# Altium PCB main.PcbDoc (part 1 of 3)
Units mm, origin at the board's own origin, x right, y up, seen from the top; angles counter-clockwise.
Board outline 74.1 x 99.1 mm, 4 copper layers (Top Layer, Ground Layer, Power Layer, Bottom Layer), stack 1.591 mm thick; 213 components, 167 nets, 923 pads, 289 vias.
Unrouted connection lines stored in the file: 41.
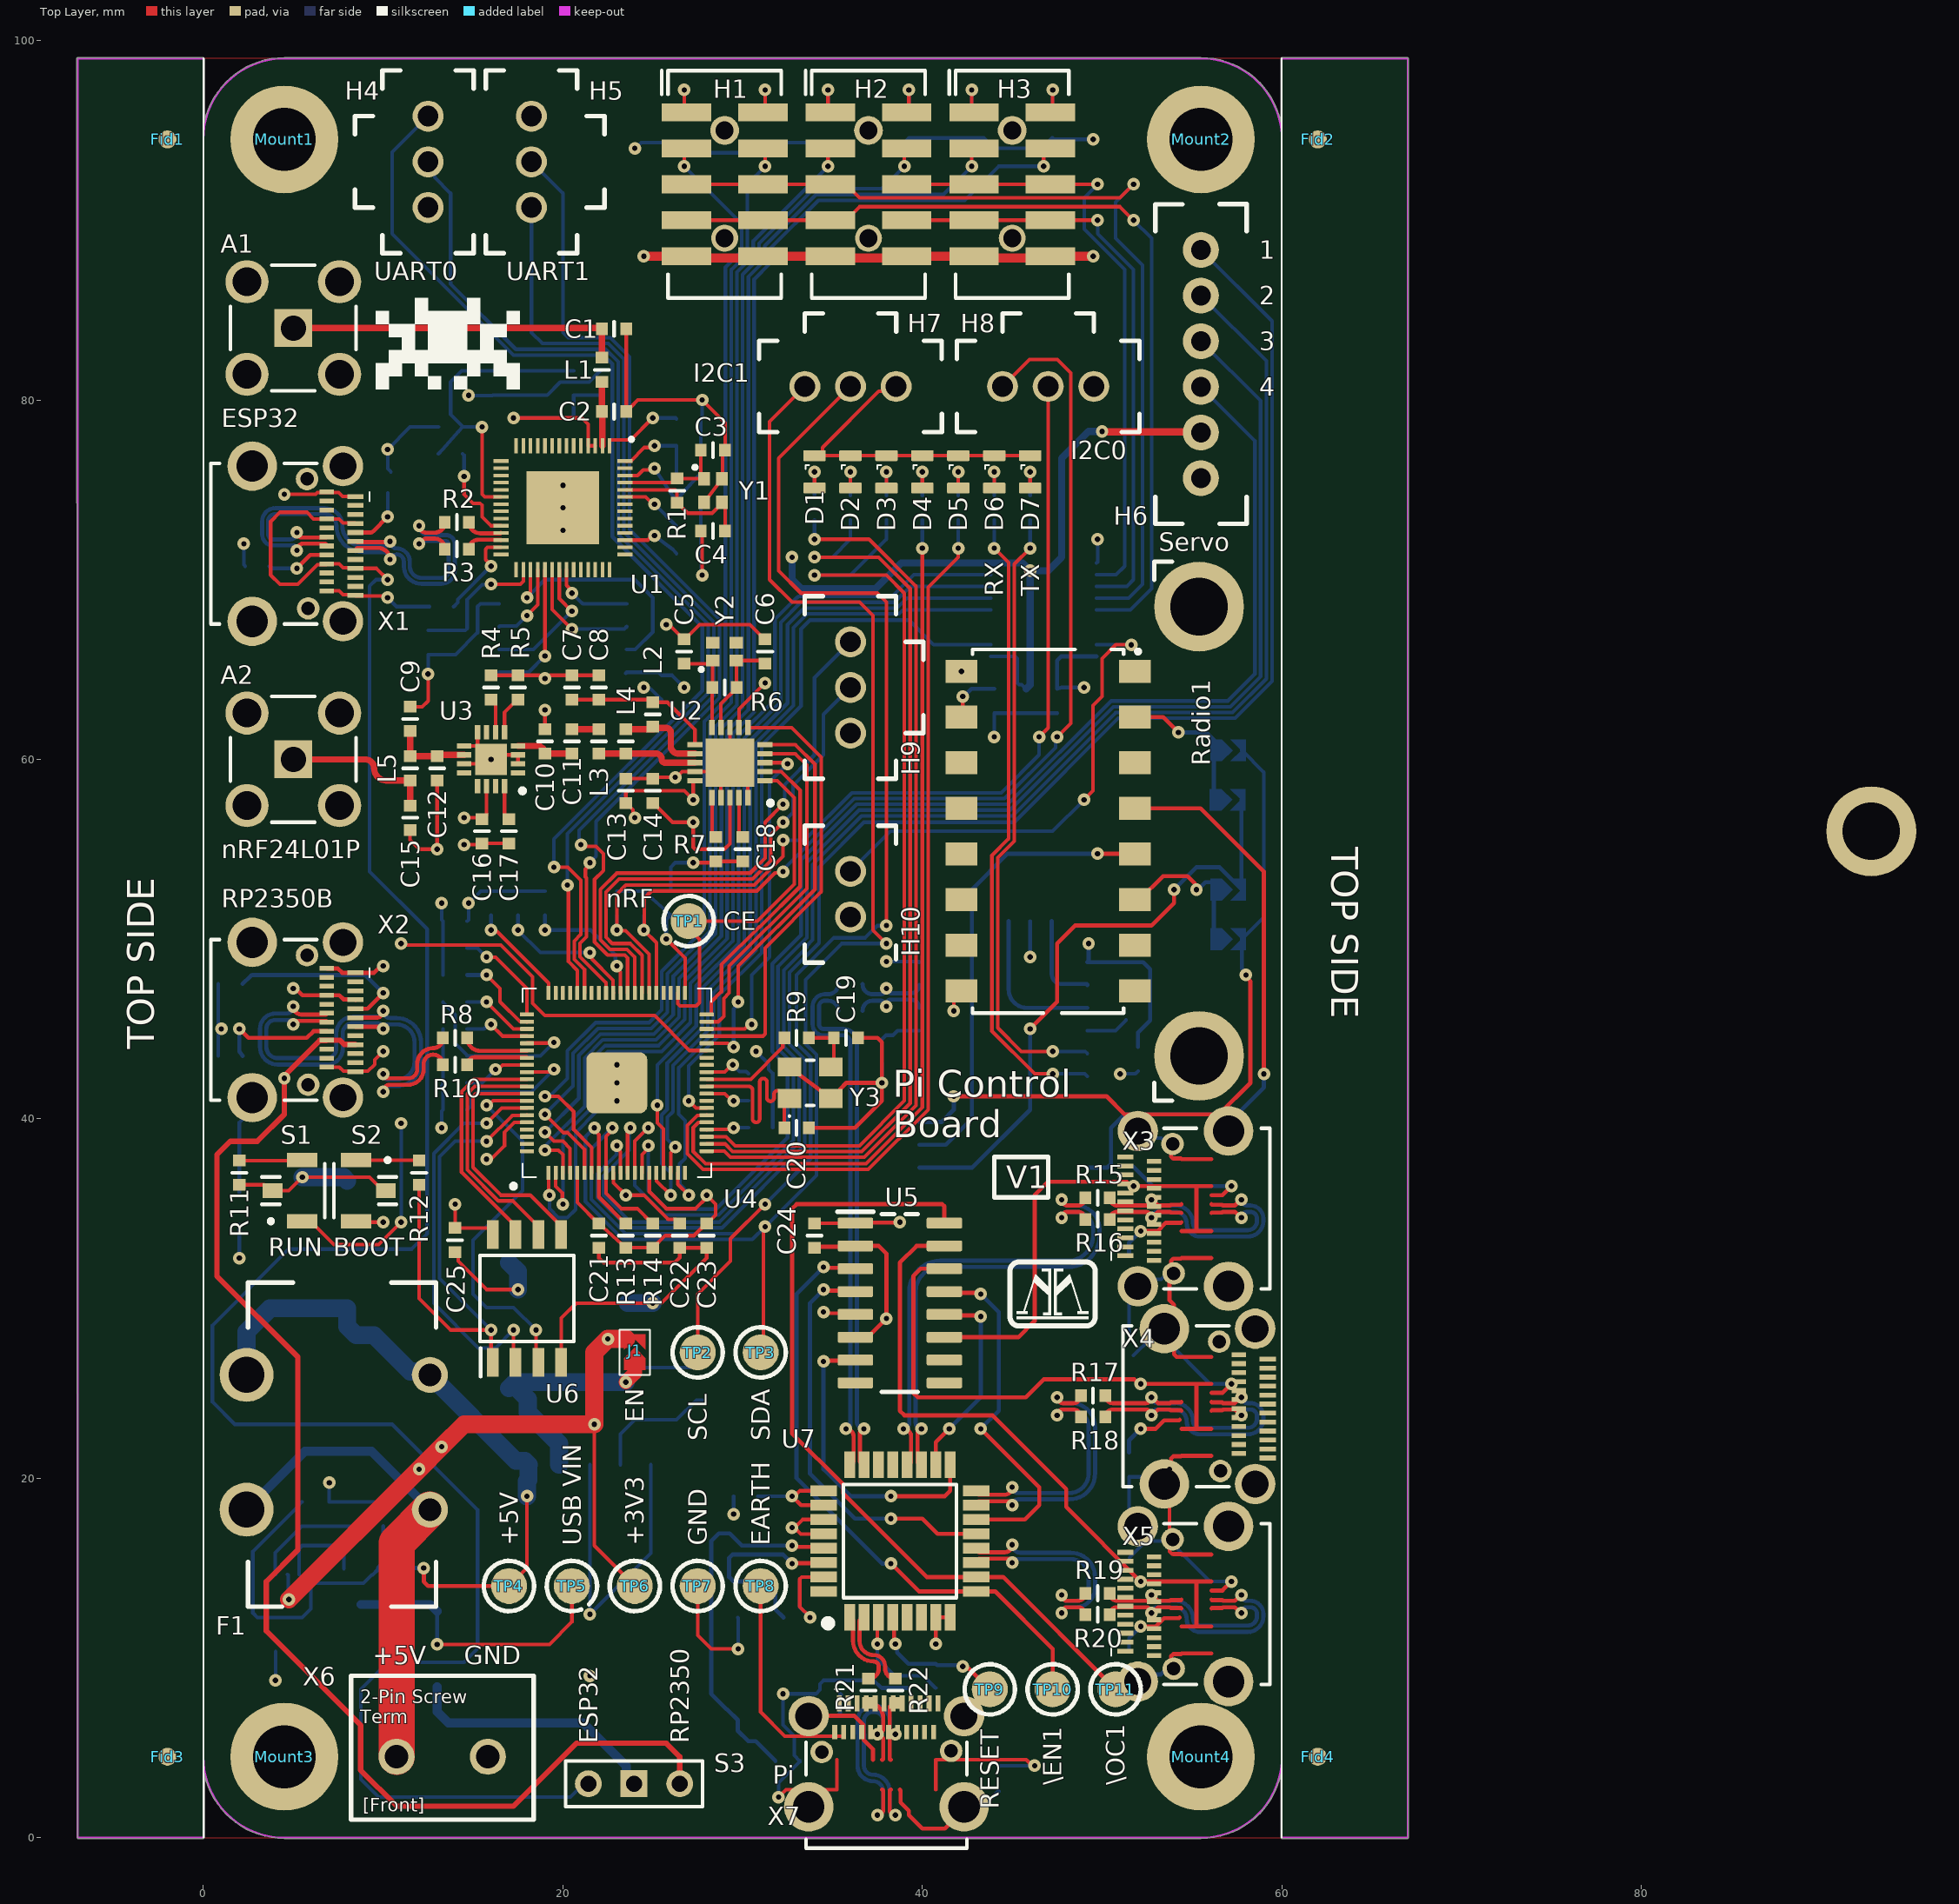
[diagram p0: Top Layer view]
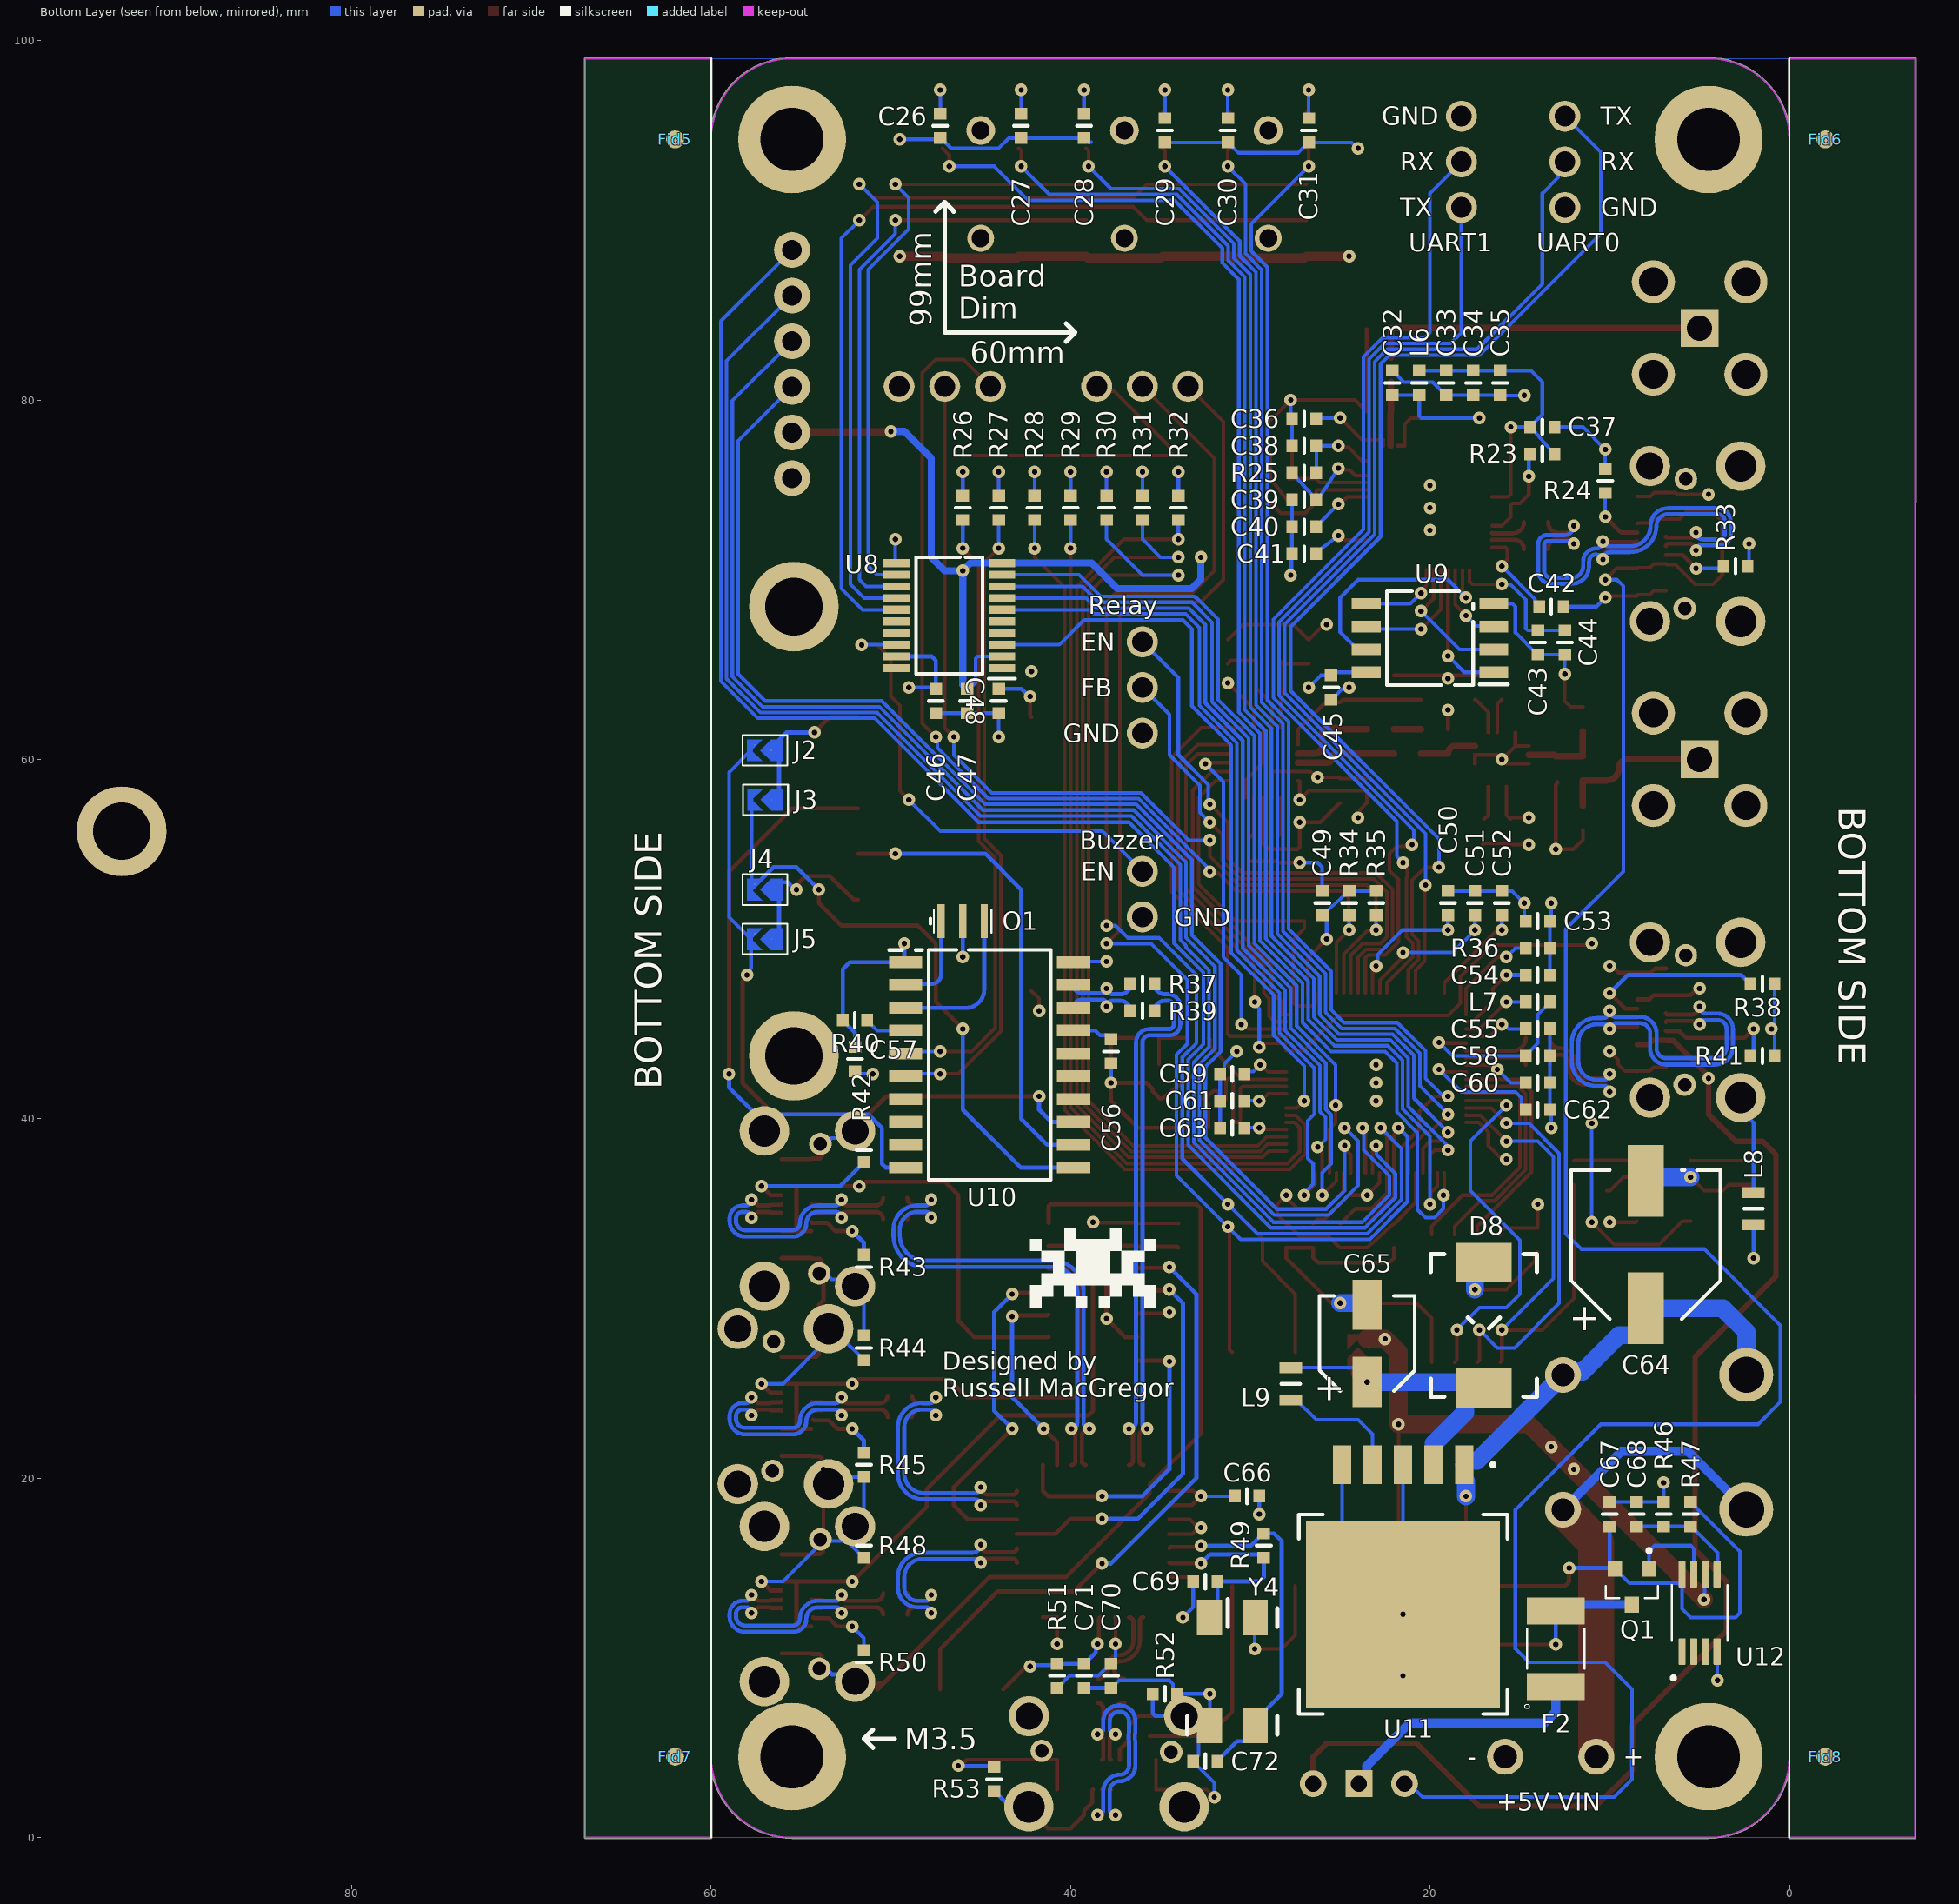
[diagram p1: Bottom Layer view, seen from below]
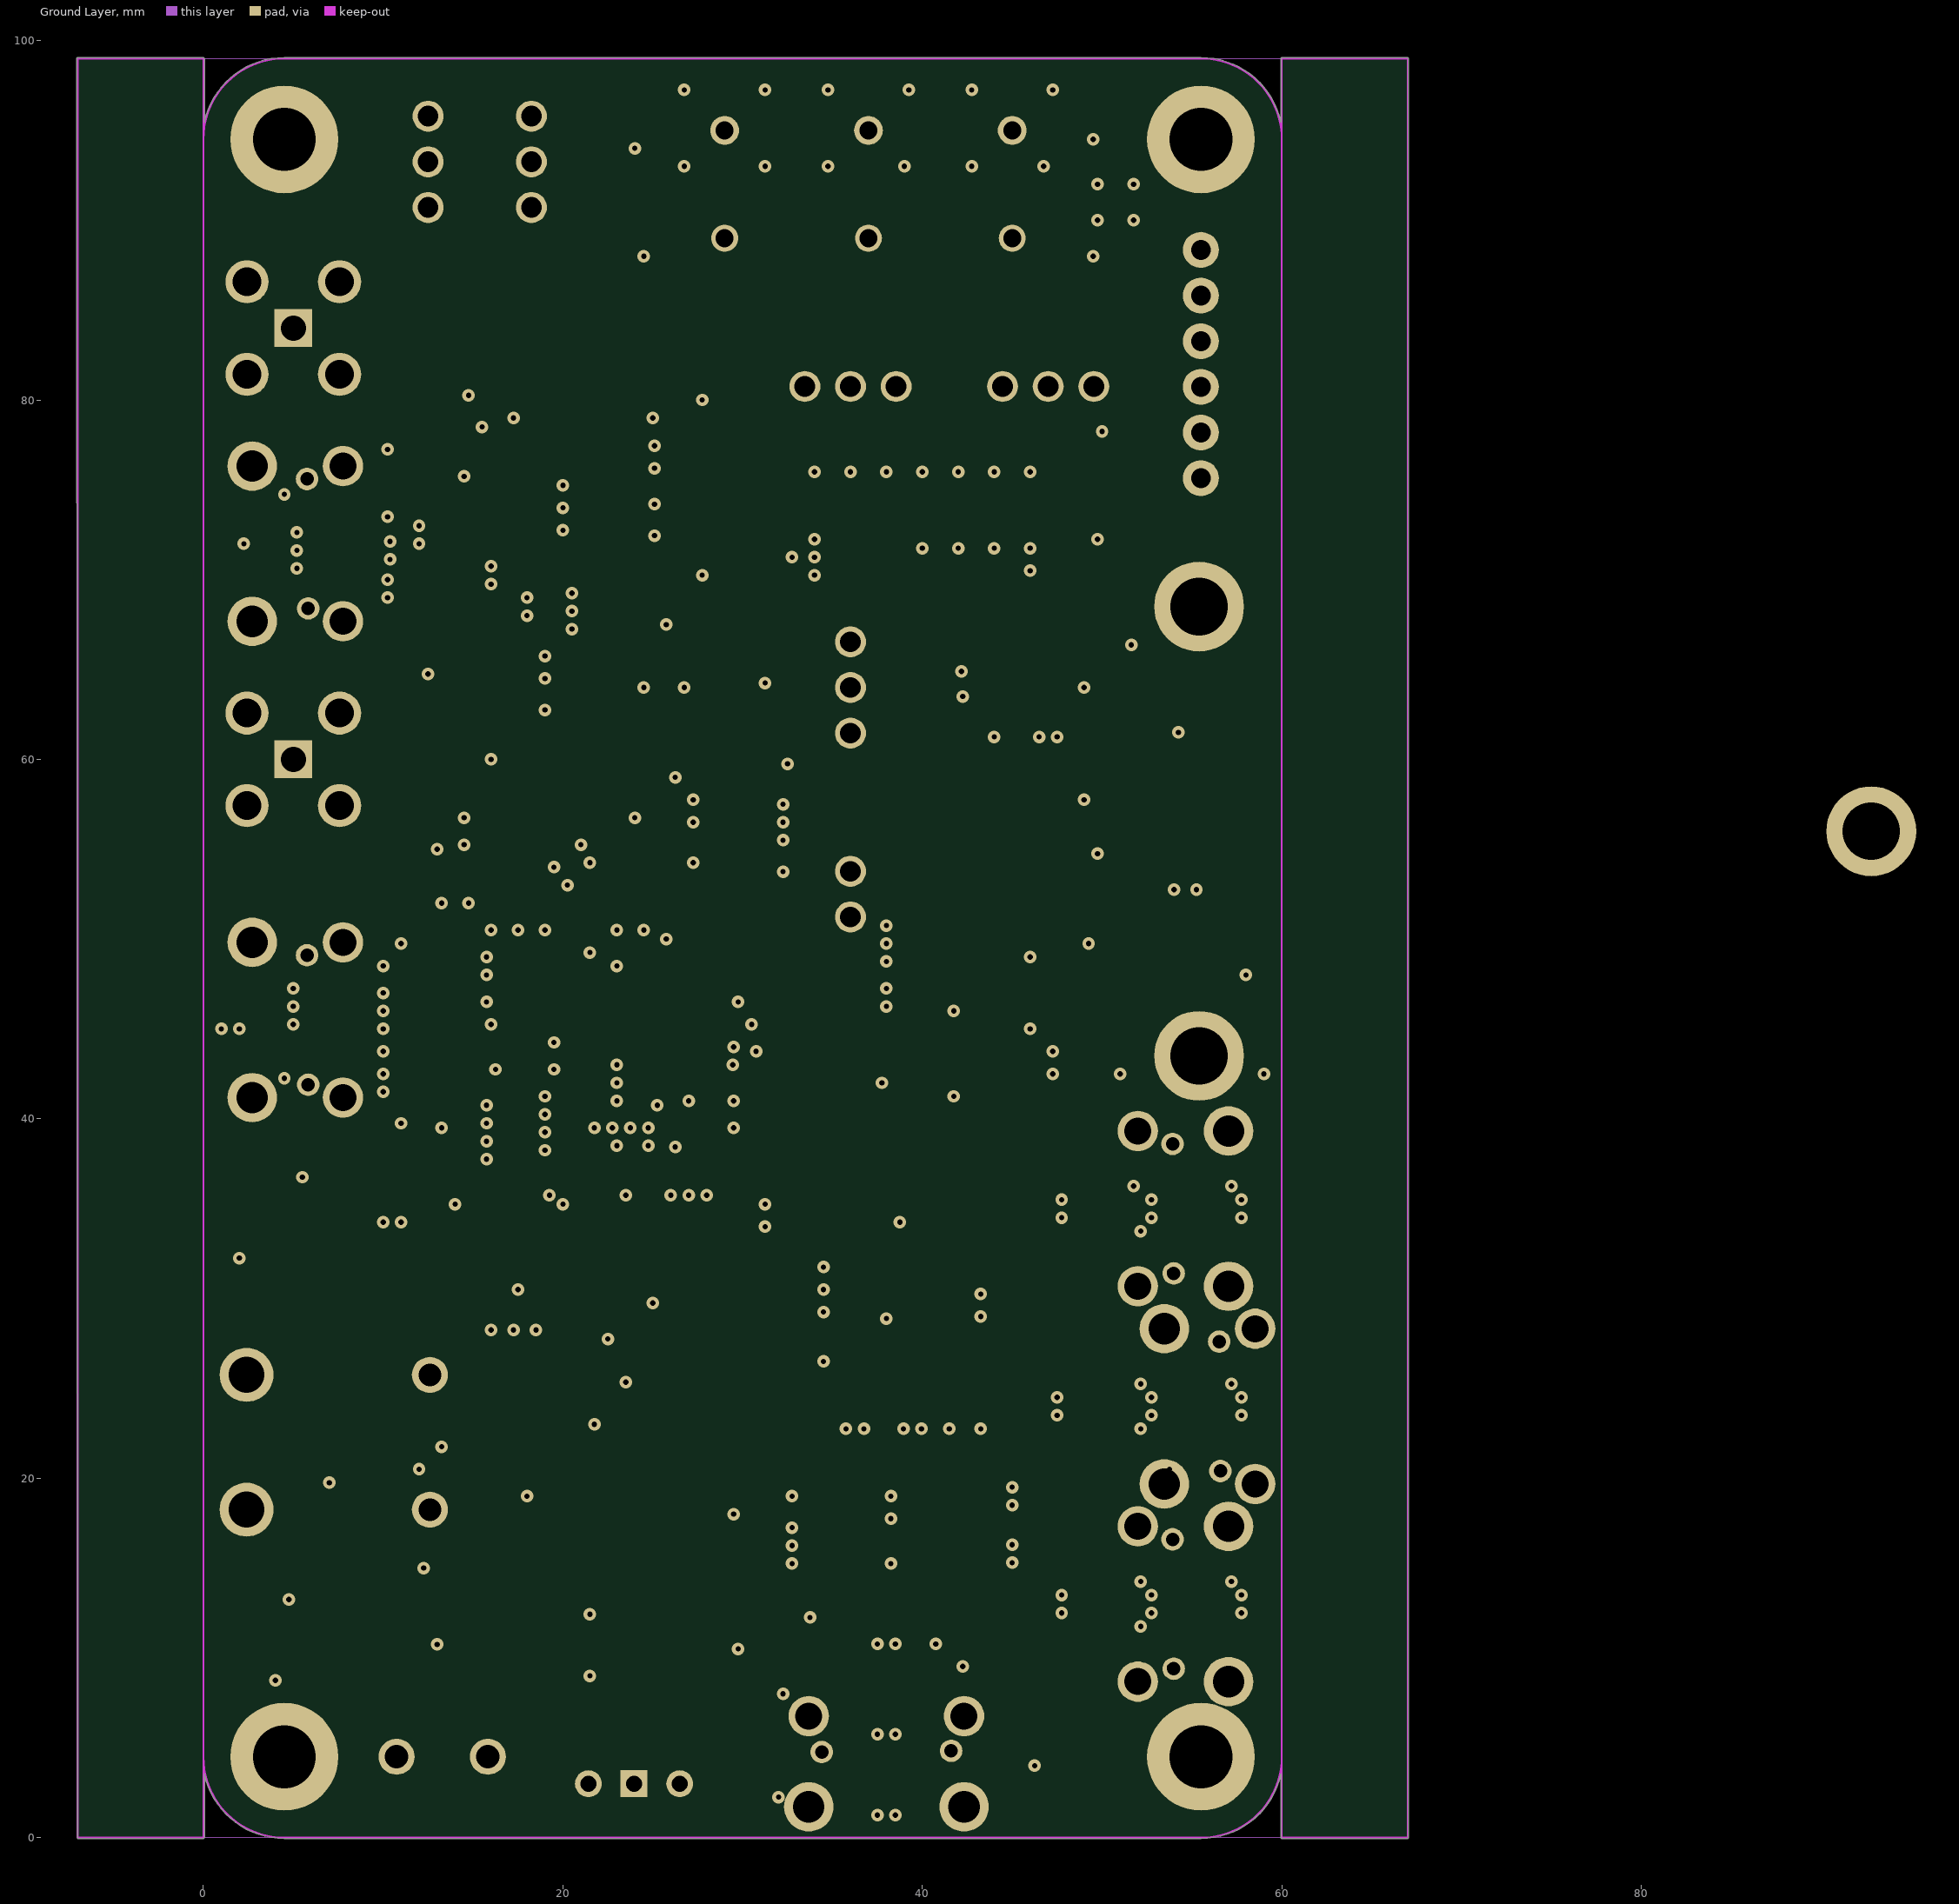
[diagram p2: Ground Layer]
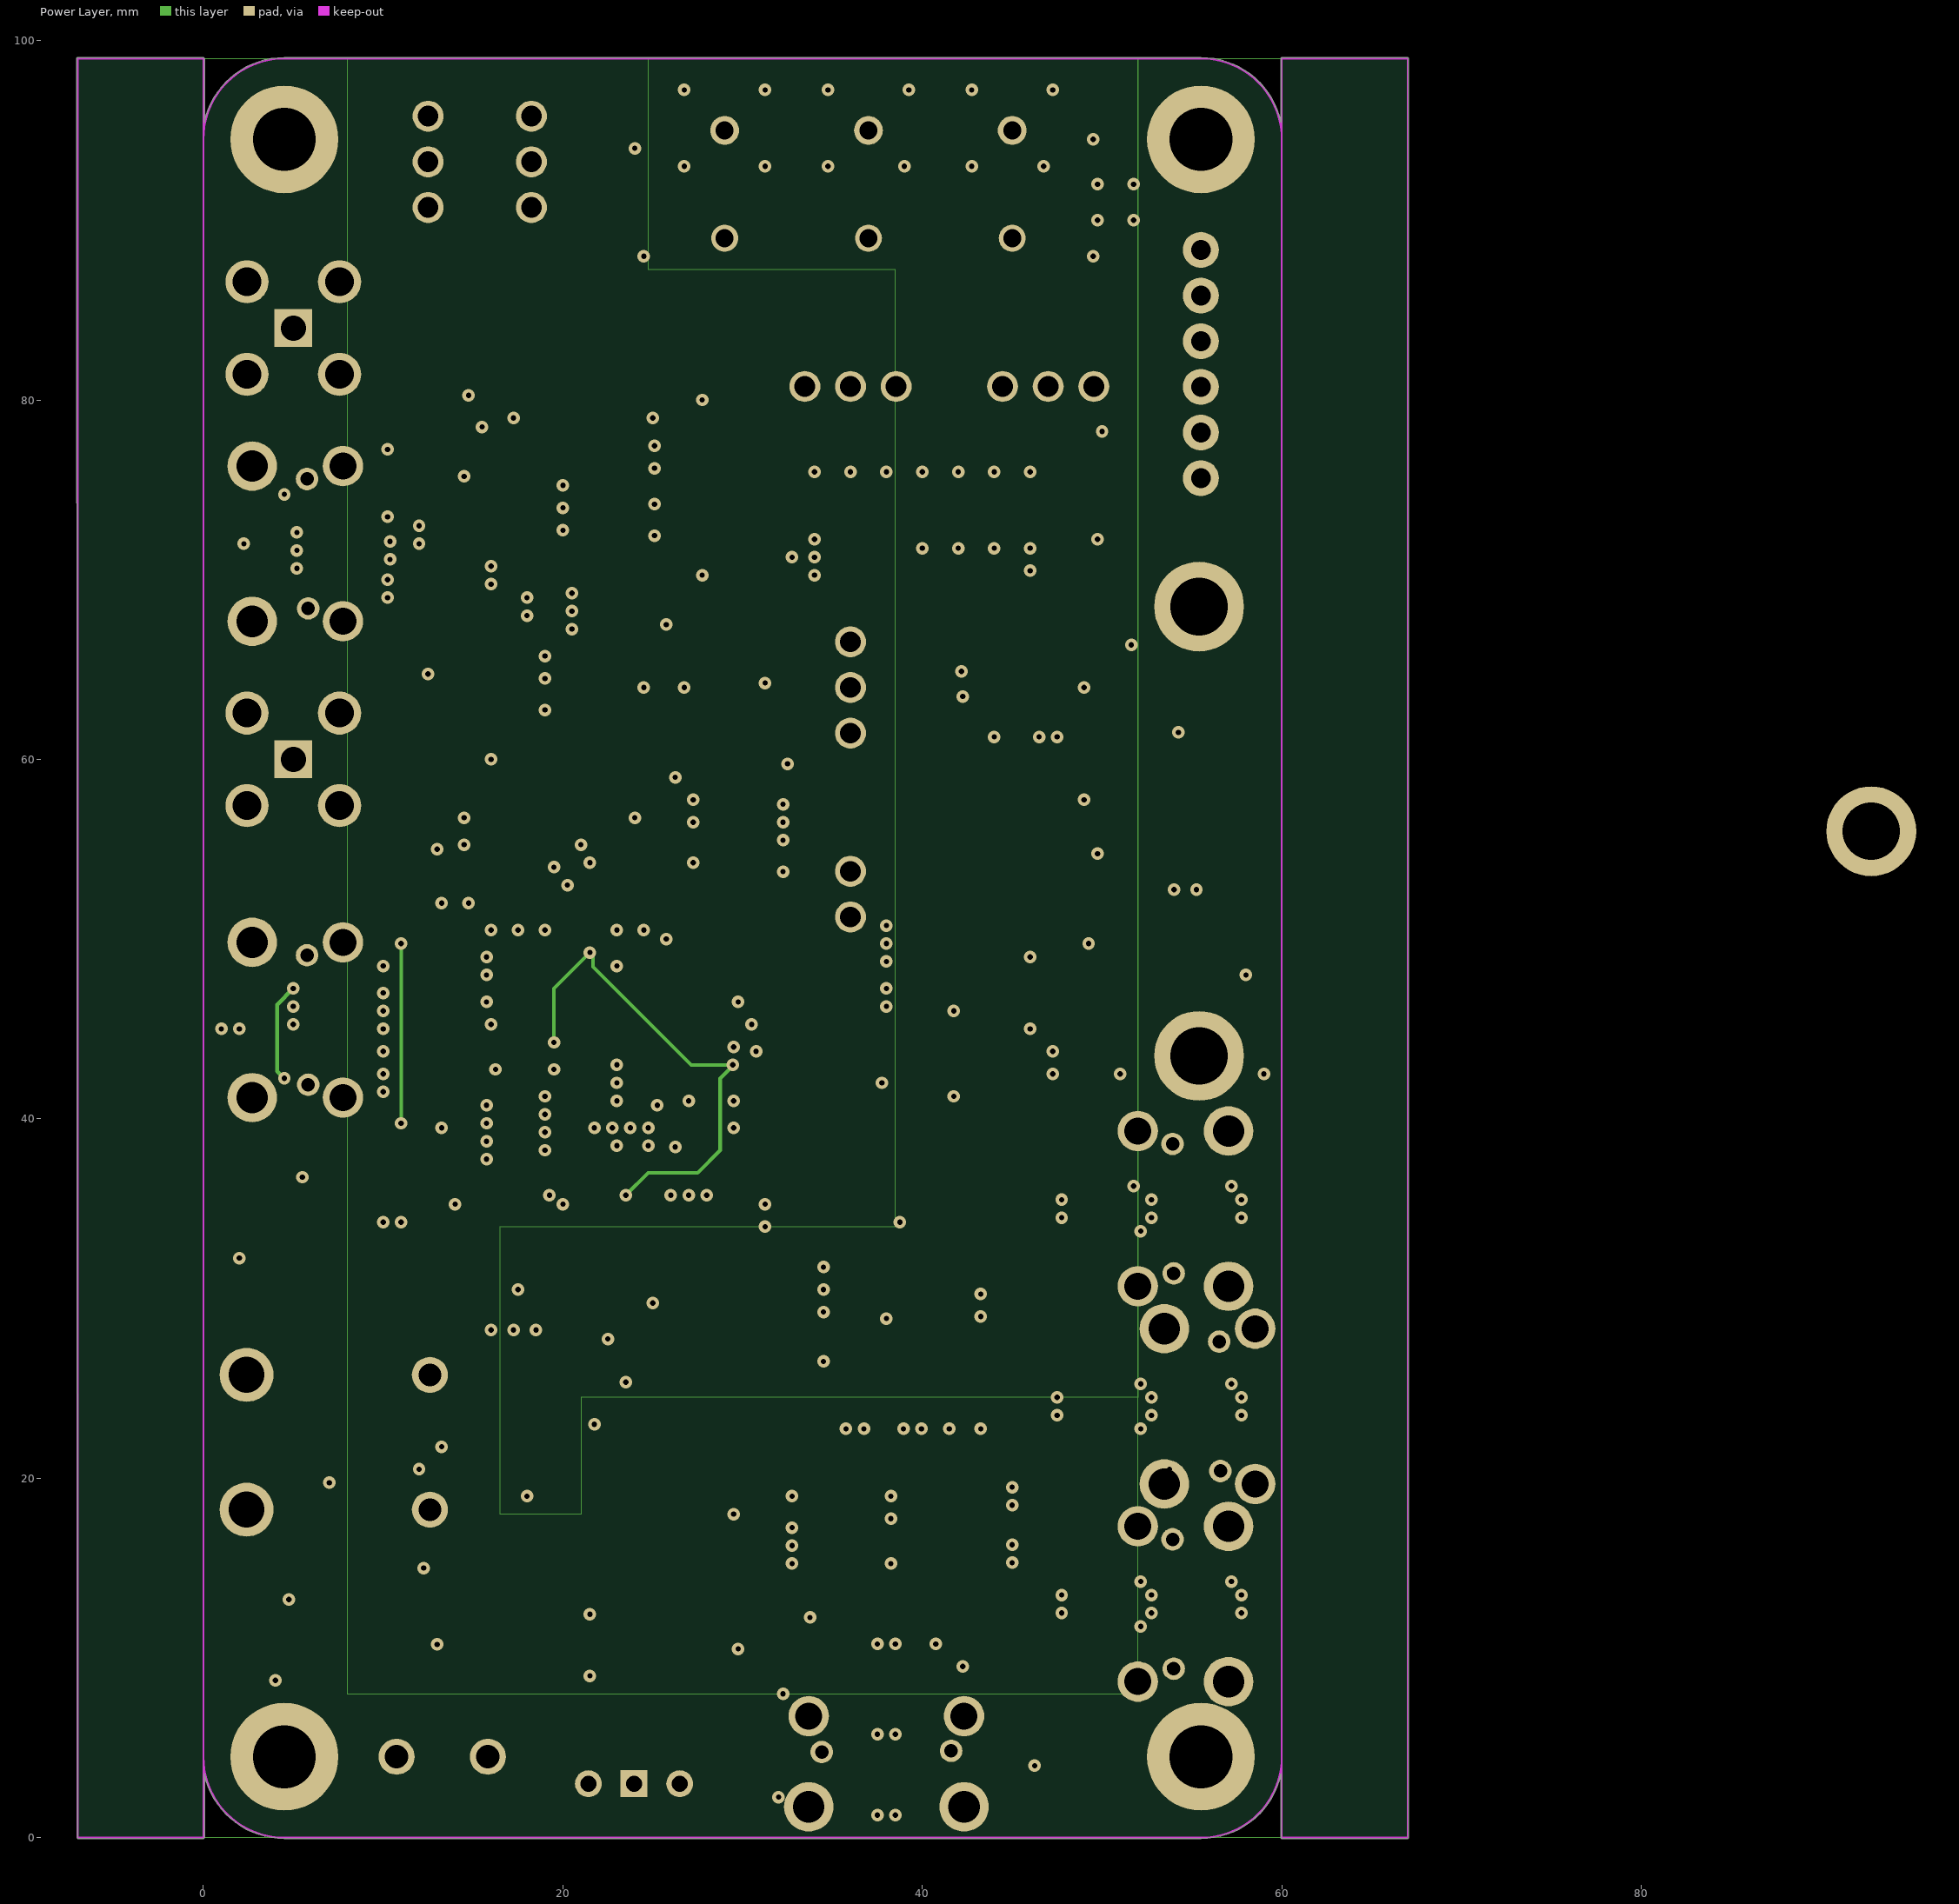
[diagram p3: Power Layer]

## Layer stack, top to bottom
Top Solder: solder mask 0.0102, Solder Resist, Dk 3.8
Top Layer: signal copper 0.035
Dielectric 2: prepreg 0.2104, 7628*1, Dk 4.4
Ground Layer: signal copper 0.0175
Dielectric 1: dielectric 1.065, FR-4, Dk 4.8
Power Layer: signal copper 0.0175
Dielectric 3: prepreg 0.2104, 7628*1, Dk 4.4
Bottom Layer: signal copper 0.035
Bottom Solder: solder mask 0.0102, Solder Resist, Dk 3.8

## Board outline
-7,-0.05 0,-0.05 0.05,0 0.05,3.548 ccw(c4.5,4.5) 4.5,-0.05 55.5,-0.05 ccw(c55.5,4.5) 59.95,3.548 59.95,0 60,-0.05 67,-0.05 67.05,0 67.05,99 67,99.05 60,99.05 59.95,99 59.95,95.452 ccw(c55.5,94.5) 55.5,99.05 4.5,99.05 ccw(c4.5,94.5) 0.05,95.452 0.05,99 0,99.05 -7,99.05 -7.05,99

## Design rules (kind name [scope] priority, off if disabled: settings)
BoardOutlineClearance [All] p1: gap=0.2 ignorepadtopadclearanceinfootprint=FALSE
Clearance "inPolygon Clearance" [InPolygon] p1: gap=0.3 ignorepadtopadclearanceinfootprint=TRUE // this rule ensures that every net within a polygon of a different net has a set clearance from the poly
Clearance "Different Diff Pair" [All] p2: gap=0.2 ignorepadtopadclearanceinfootprint=TRUE
Clearance "Same Diff Pair" [All] p3: gap=0.1 ignorepadtopadclearanceinfootprint=TRUE
Clearance "Different Nets" [not InAnyDifferentialPair] p4: gap=0.3 ignorepadtopadclearanceinfootprint=TRUE except(0.1: Arc-SMDPad Arc-THPad Arc-Via Arc-Text Track-SMDPad Track-THPad Track-Via Track-Text SMDPad-Text THPad-Text Via-Text Fill-Text Poly-Text Region-Text Text-Text; 0.12: Arc-Arc Arc-Track Track-Track; 0.15: SMDPad-SMDPad SMDPad-THPad SMDPad-Via THPad-THPad THPad-Via Via-Via; 0.2: Arc-Hole Track-Hole SMDPad-Hole THPad-Hole Via-Hole Fill-Hole Poly-Hole Region-Hole Text-Hole)
Clearance "Same Net" [not InAnyDifferentialPair] p5: gap=0 ignorepadtopadclearanceinfootprint=TRUE except(0.1: THPad-Via; 0.18: Arc-Arc Arc-Track Track-Track)
ComponentClearance [All] p1: gap=0.102 collisioncheckmode=3 verticalgap=0.102 showdistances=TRUE
DiffPairsRouting "Ethernet Routing" [InDifferentialPairClass('Ethernet_Pairs')] p1: maxlimit=0.25 minlimit=0.2 mostfreqgap=0.25 toplayer_maxgap=0.2 toplayer_prefgap=0.2 toplayer_minwidth=0.25 toplayer_maxwidth=0.25 toplayer_prefwidth=0.25 midlayer1_mingap=0.25 midlayer1_minwidth=0.19 midlayer1_maxwidth=0.19 midlayer1_prefwidth=0.19 midlayer2_mingap=0.25 midlayer2_minwidth=0.19 midlayer2_maxwidth=0.19 midlayer2_prefwidth=0.19 bottomlayer_maxgap=0.2 bottomlayer_prefgap=0.2 bottomlayer_minwidth=0.25 bottomlayer_maxwidth=0.25 bottomlayer_prefwidth=0.25 impedanceprofiledriven=TRUE maxuncoupledlength=12.7
DiffPairsRouting "USB Routing" [InDifferentialPairClass('USB_Pairs')] p2: maxlimit=0.291 minlimit=0.127 mostfreqgap=0.291 toplayer_maxgap=0.127 toplayer_prefgap=0.127 toplayer_minwidth=0.23 toplayer_maxwidth=0.23 toplayer_prefwidth=0.23 midlayer1_mingap=0.291 midlayer1_minwidth=0.25 midlayer1_maxwidth=0.25 midlayer1_prefwidth=0.25 midlayer2_mingap=0.291 midlayer2_minwidth=0.25 midlayer2_maxwidth=0.25 midlayer2_prefwidth=0.25 bottomlayer_maxgap=0.127 bottomlayer_prefgap=0.127 bottomlayer_minwidth=0.23 bottomlayer_maxwidth=0.23 bottomlayer_prefwidth=0.23 impedanceprofiledriven=TRUE impedanceprofileid={92A73BB9-0D45-4B00-A6B6-E2EA836A145B} impedanceprofilevalue=90.000000 maxuncoupledlength=12.7
DiffPairsRouting "CAN Routing" [InDifferentialPairClass('CAN_Pairs')] p3: maxlimit=0.907 minlimit=0.5 mostfreqgap=0.907 toplayer_maxgap=0.5 toplayer_prefgap=0.5 toplayer_minwidth=0.201 toplayer_maxwidth=0.201 toplayer_prefwidth=0.201 midlayer1_mingap=0.907 midlayer1_minwidth=0.155 midlayer1_maxwidth=0.155 midlayer1_prefwidth=0.155 midlayer2_mingap=0.907 midlayer2_minwidth=0.155 midlayer2_maxwidth=0.155 midlayer2_prefwidth=0.155 bottomlayer_maxgap=0.5 bottomlayer_prefgap=0.5 bottomlayer_minwidth=0.201 bottomlayer_maxwidth=0.201 bottomlayer_prefwidth=0.201 maxuncoupledlength=12.7
Height [All] p1: minheight=0 maxheight=1816.048 prefheight=12.7
HoleSize [All] p1: absolutevalues=TRUE maxlimit=6.3 minlimit=0.3 maxpercent=80.000 minpercent=20.000
HoleToHoleClearance [All] p1: gap=0.25 allowstackedmicrovias=FALSE
Length [All] p1: maxlimit=43.432 minlimit=0 usedelayunits=TRUE mindelay=0.000000 maxdelay=10000.000000
MatchedLengths "Diff Pair Matched Delays" [InDifferentialPairClass('Ethernet_Pairs') or InDifferentialPairClass('USB_Pairs') or InDifferentialPairClass('CAN_Pairs')] p1: tolerance=5 checknetsindiffpair=TRUE checkdiffpairvsdiffpair=FALSE checkxsignals=FALSE checkothers=FALSE usedelayunits=TRUE delaytolerance=100.000000
MinimumAnnularRing [All] p1: minimumring=0.2
MinimumSolderMaskSliver [All] p1: minsoldermaskwidth=0
PlaneClearance "Supply Net Clearance" [InNetClass('Supply_Nets')] p1: clearance=0.5
PlaneClearance "All Nets" [All] p2: clearance=0.3
PolygonConnect "Supply Nets" [InNetClass('Supply_Nets')] p1: connectstyle=Direct reliefconductorwidth=0.3 reliefentries=4 polygonreliefangle="90 Angle" airgapwidth=0.254
PolygonConnect General [All] p2: connectstyle=Relief reliefconductorwidth=0.254 reliefentries=4 polygonreliefangle="90 Angle" airgapwidth=0.254
RoutingVias [All] p1: holewidth=0.2 width=0.35 viastyle="Through Hole" minholewidth=0.15 minwidth=0.3 maxholewidth=6.3 maxwidth=6.55
SilkToSilkClearance [All] p1: silktosilkclearance=0
SilkToSolderMaskClearance [All] p1: minsilkscreentomaskgap=0 clearancetoexposedcopper=TRUE
SolderMaskExpansion [All] p1: expansion=0.075 istentingtop=FALSE
SupplyNets "Schematic Supply Nets_9" [InNet('RUN')] p1: voltage=0.000
SupplyNets "Schematic Supply Nets_6" [InNet('XOUT')] p2: voltage=0.000
SupplyNets "Schematic Supply Nets_4" [InNet('+5V')] p3: voltage=0.000
SupplyNets "Schematic Supply Nets_2" [InNet('XIN')] p4: voltage=0.000
SupplyNets "Schematic Supply Nets_8" [InNet('+1V1')] p5: voltage=0.000
SupplyNets "Schematic Supply Nets_7" [InNet('+3V3')] p6: voltage=0.000
SupplyNets "Schematic Supply Nets_3" [InNet('GND')] p7: voltage=0.000
SupplyNets "Schematic Supply Nets_1" [InNet('Earth')] p8: voltage=0.000
UnRoutedNet [All] p1: checkbadconnections=TRUE
Width "nRF Width" [InNetClass('nRF Signal')] p1: maxlimit=0.35 minlimit=0.263 preferedwidth=0.35 toplayer_minwidth=0.35 midlayer1_maxwidth=0.263 midlayer1_prefwidth=0.263 midlayer2_maxwidth=0.263 midlayer2_prefwidth=0.263 bottomlayer_minwidth=0.35 impedanceprofiledriven=TRUE impedanceprofileid={1CF160E3-3FD0-4C14-808E-7B4BEBCE77F9} impedanceprofilevalue=50.000000 minimp=50.000000 maximp=50.000000 favimp=50.000000 checkconnectedcopper=TRUE
Width [All] p2: maxlimit=100 minlimit=0.1 preferedwidth=0.3
20 further rules are at their usual default settings.

## Classes and differential pairs
net class "nRF Signal": ANT1 ANT2 LNA-In NetA1_1 NetC9_2 NetC11_2 "SMA Antenna" TXRX
component class "Peripheral Connections": C48 C56 C57 D6 D7 H4 H5 H7 H8 J2 J3 J4 J5 O1 R26 R27 R40 Radio1 U10
component class Power: C64 C65 C67 C68 D8 F1 F2 J1 L9 Q1 R46 R47 S3 U11 U12 X6
differential pair class USB_Pairs: ESP_DX RP2350_D RP2350_DX USB0_D USB0_DX USB1_D USB1_DX USB2_D USB2_DX USB3_D USB3_DX USB4_D USB4_DX
net class Supply_Nets: +3V3 +5V Earth GND NetC65_1
component class "USB Hub": C24 C66 C69 C70 C71 C72 R15 R16 R17 R18 R19 R20 R21 R22 R37 R39 R42 R43 R44 R45 R48 R49 R50 R51 R52 R53 U5 U7 X3 X4 X5 X7 Y4
component class "Safety Devices": D1 D2 D3 D4 D5 H9 H10 R28 R29 R30 R31 R32
component class RP2350: C19 C20 C21 C22 C23 C25 C49 C50 C51 C52 C53 C54 C55 C58 C59 C60 C61 C62 C63 L7 R8 R9 R10 R11 R12 R13 R14 R34 R35 R36 R38 R41 S1 S2 U4 U6 X2 Y3
component class "Overview and Power": Fid1 Fid2 Fid3 Fid4 Fid5 Fid6 Fid7 Fid8 L8 Mount1 Mount2 Mount3 Mount4 TP1 TP2 TP3 TP4 TP5 TP6 TP7 TP8 TP9 TP10 TP11
component class NRF24L01P: A2 C5 C6 C7 C8 C9 C10 C11 C12 C13 C14 C15 C16 C17 C18 L2 L3 L4 L5 R4 R5 R6 R7 U2 U3 Y2
component class "Motor Drivers": C26 C27 C28 C29 C30 C31 C46 C47 H1 H2 H3 H6 U8
component class ESP32-S2: A1 C1 C2 C3 C4 C32 C33 C34 C35 C36 C37 C38 C39 C40 C41 C42 C43 C44 C45 L1 L6 R1 R2 R3 R23 R24 R25 R33 U1 U9 X1 Y1
differential pair USB0_DX: +USB0_DX_P -USB0_DX_N
differential pair USB0_D: +USB0_D_P -USB0_D_N
differential pair USB4_DX: +USB4_DX_P -USB4_DX_N
differential pair USB4_D: +USB4_D_P -USB4_D_N
differential pair USB3_DX: +USB3_DX_P -USB3_DX_N
differential pair USB3_D: +USB3_D_P -USB3_D_N
differential pair USB2_DX: +USB2_DX_P -USB2_DX_N
differential pair USB2_D: +USB2_D_P -USB2_D_N
differential pair USB1_DX: +USB1_DX_P -USB1_DX_N
differential pair USB1_D: +USB1_D_P -USB1_D_N
differential pair RP2350_DX: +RP2350_DX_P -RP2350_DX_N
differential pair RP2350_D: +RP2350_D_P -RP2350_D_N
differential pair ESP_DX: +ESP_DX_P -ESP_DX_N
differential pair ESP_D: +ESP_D_P -ESP_D_N

## Components (designator, comment, footprint, x,y, rotation, side; value= is the part's Value field where it differs from the comment)
A1 "RP-SMA 50-Ohm" "[SMA] RP-SMA 90deg Jack" 5,84 r90 top
A2 "RP-SMA 50-Ohm" "[SMA] RP-SMA 90deg Jack" 5,60 r90 top
C1 "SMD Nonpolarized" "[Cap] SMD 0603" 22.85,83.95 r180 top
C2 "SMD Nonpolarized" "[Cap] SMD 0603" 22.85,79.35 r180 top
C3 "SMD Nonpolarized" "[Cap] SMD 0603" 28.35,77.2 r180 top
C4 "SMD Nonpolarized" "[Cap] SMD 0603" 28.35,72.7 r0 top
C5 "SMD Nonpolarized" "[Cap] SMD 0603" 26.75,66 r90 top
C6 "SMD Nonpolarized" "[Cap] SMD 0603" 31.25,66 r90 top
C7 "SMD Nonpolarized" "[Cap] SMD 0603" 20.5,64 r270 top
C8 "SMD Nonpolarized" "[Cap] SMD 0603" 22,64 r270 top
C9 "SMD Nonpolarized" "[Cap] SMD 0603" 11.5,62.25 r270 top
C10 "SMD Nonpolarized" "[Cap] SMD 0603" 19,61 r90 top
C11 "SMD Nonpolarized" "[Cap] SMD 0603" 20.5,61 r90 top
C12 "SMD Nonpolarized" "[Cap] SMD 0603" 13,59.5 r90 top
C13 "SMD Nonpolarized" "[Cap] SMD 0603" 23.5,58.25 r270 top
C14 "SMD Nonpolarized" "[Cap] SMD 0603" 25,58.25 r270 top
C15 "SMD Nonpolarized" "[Cap] SMD 0603" 11.5,56.75 r90 top
C16 "SMD Nonpolarized" "[Cap] SMD 0603" 15.5,56 r90 top
C17 "SMD Nonpolarized" "[Cap] SMD 0603" 17,56 r90 top
C18 "SMD Nonpolarized" "[Cap] SMD 0603" 30,55 r90 top
C19 "[Cap] SMD Nonpolarized" "[Cap] SMD 0603" 35.75,44.5 r180 top
C20 "[Cap] SMD Nonpolarized" "[Cap] SMD 0603" 33,39.5 r180 top
C21 "[Cap] SMD Nonpolarized" "[Cap] SMD 0603" 22,33.5 r90 top
C22 "[Cap] SMD Nonpolarized" "[Cap] SMD 0603" 26.5,33.5 r90 top
C23 "[Cap] SMD Nonpolarized" "[Cap] SMD 0603" 28,33.5 r90 top
C24 "[Cap] SMD Nonpolarized" "[Cap] SMD 0603" 34,33.5 r270 top
C25 "[Cap] SMD Nonpolarized" "[Cap] SMD 0603" 14,33.25 r270 top
C26 "[Cap] SMD Nonpolarized" "[Cap] SMD 0603" 47.25,95.25 r90 bottom
C27 "[Cap] SMD Nonpolarized" "[Cap] SMD 0603" 42.75,95.25 r90 bottom
C28 "[Cap] SMD Nonpolarized" "[Cap] SMD 0603" 39.25,95.25 r90 bottom
C29 "[Cap] SMD Nonpolarized" "[Cap] SMD 0603" 34.75,95 r90 bottom
C30 "[Cap] SMD Nonpolarized" "[Cap] SMD 0603" 31.25,95 r90 bottom
C31 "[Cap] SMD Nonpolarized" "[Cap] SMD 0603" 26.75,95 r90 bottom
C32 "SMD Nonpolarized" "[Cap] SMD 0603" 22.1,80.95 r270 bottom
C33 "SMD Nonpolarized" "[Cap] SMD 0603" 19.1,80.95 r90 bottom
C34 "SMD Nonpolarized" "[Cap] SMD 0603" 17.6,80.95 r90 bottom
C35 "SMD Nonpolarized" "[Cap] SMD 0603" 16.1,80.95 r90 bottom
C36 "SMD Nonpolarized" "[Cap] SMD 0603" 27,78.95 r180 bottom
C37 "[Cap] SMD Nonpolarized" "[Cap] SMD 0603" 13.75,78.5 r0 bottom
C38 "SMD Nonpolarized" "[Cap] SMD 0603" 27,77.45 r180 bottom
C39 "SMD Nonpolarized" "[Cap] SMD 0603" 27,74.45 r180 bottom
C40 "SMD Nonpolarized" "[Cap] SMD 0603" 27,72.95 r180 bottom
C41 "[Cap] SMD Nonpolarized" "[Cap] SMD 0603" 27,71.45 r180 bottom
C42 "[Cap] SMD Nonpolarized" "[Cap] SMD 0603" 13.25,68.5 r0 bottom
C43 "SMD Nonpolarized" "[Cap] SMD 0603" 14,66.5 r90 bottom
C44 "[Cap] SMD Nonpolarized" "[Cap] SMD 0603" 12.5,66.5 r90 bottom
C45 "[Cap] SMD Nonpolarized" "[Cap] SMD 0603" 25.5,64 r90 bottom
C46 "[Cap] SMD Nonpolarized" "[Cap] SMD 0603" 47.5,63.25 r90 bottom
C47 "[Cap] SMD Nonpolarized" "[Cap] SMD 0603" 45.75,63.25 r90 bottom
C48 "[Cap] SMD Nonpolarized" "[Cap] SMD 0603" 44,63.25 r90 bottom
C49 "[Cap] SMD Nonpolarized" "[Cap] SMD 0603" 26,52 r270 bottom
C50 "[Cap] SMD Nonpolarized" "[Cap] SMD 0603" 19,52 r270 bottom
C51 "[Cap] SMD Nonpolarized" "[Cap] SMD 0603" 17.5,52 r270 bottom
C52 "[Cap] SMD Nonpolarized" "[Cap] SMD 0603" 16,52 r270 bottom
C53 "[Cap] SMD Nonpolarized" "[Cap] SMD 0603" 14,51 r0 bottom
C54 "[Cap] SMD Nonpolarized" "[Cap] SMD 0603" 14,48 r180 bottom
C55 "[Cap] SMD Nonpolarized" "[Cap] SMD 0603" 14,45 r0 bottom
C56 "[Cap] SMD Nonpolarized" "[Cap] SMD 0603" 37.75,43.75 r90 bottom
C57 "[Cap] SMD Nonpolarized" "[Cap] SMD 0603" 52,43.325 r90 bottom
C58 "[Cap] SMD Nonpolarized" "[Cap] SMD 0603" 14,43.5 r0 bottom
C59 "[Cap] SMD Nonpolarized" "[Cap] SMD 0603" 31,42.5 r180 bottom
C60 "[Cap] SMD Nonpolarized" "[Cap] SMD 0603" 14,42 r0 bottom
C61 "[Cap] SMD Nonpolarized" "[Cap] SMD 0603" 31,41 r180 bottom
C62 "[Cap] SMD Nonpolarized" "[Cap] SMD 0603" 14,40.5 r0 bottom
C63 "[Cap] SMD Nonpolarized" "[Cap] SMD 0603" 31,39.5 r180 bottom
C64 "SMD Polarized" "[Cap] SMD Polarized, 8mm" 8,33 r90 bottom
C65 "SMD Polarized" "[Cap] SMD Polarized, 5mm" 23.5,27.5 r90 bottom
C66 "[Cap] SMD Nonpolarized" "[Cap] SMD 0603" 30.175,19 r0 bottom
C67 "[Cap] SMD Nonpolarized" "[Cap] SMD 0603" 10,18 r270 bottom
C68 "[Cap] SMD Nonpolarized" "[Cap] SMD 0603" 8.5,18 r270 bottom
C69 "SMD Nonpolarized" "[Cap] SMD 0603" 32.5,14.25 r0 bottom
C70 "[Cap] SMD Nonpolarized" "[Cap] SMD 0603" 37.75,9 r90 bottom
C71 "[Cap] SMD Nonpolarized" "[Cap] SMD 0603" 39.25,9 r90 bottom
C72 "SMD Nonpolarized" "[Cap] SMD 0603" 32.5,4.25 r0 bottom
D1 "SMD LED" "[LED] SMD 0805" 34,76 r90 top
D2 "SMD LED" "[LED] SMD 0805" 36,76 r90 top
D3 "SMD LED" "[LED] SMD 0805" 38,76 r90 top
D4 "SMD LED" "[LED] SMD 0805" 40,76 r90 top
D5 "SMD LED" "[LED] SMD 0805" 42,76 r90 top
D6 "SMD LED" "[LED] SMD 0805" 44,76 r90 top
D7 "SMD LED" "[LED] SMD 0805" 46,76 r90 top
D8 "Schottky" "[Diode] SMD DO-214AB" 17,28.5 r270 bottom
F1 "Right-Angle" "[Fuse] Blade Right-Angle" 7.5,22 r270 top
F2 "[PTC] 500mA Trip" "[PTC] 500mA Trip" 13,10.5 r90 bottom
Fid1 "JLCPCB Pick & Place Fiducial" "[Fiducial] JLCPCB Pick & Place"#1 -2,94.5 r0 top
Fid2 "JLCPCB Pick & Place Fiducial" "[Fiducial] JLCPCB Pick & Place"#2 62,93.5 r90 top
Fid3 "JLCPCB Pick & Place Fiducial" "[Fiducial] JLCPCB Pick & Place"#1 -2,4.5 r90 top
Fid4 "JLCPCB Pick & Place Fiducial" "[Fiducial] JLCPCB Pick & Place"#3 62.25,2.5 r90 top
Fid5 "JLCPCB Pick & Place Fiducial" "[Fiducial] JLCPCB Pick & Place"#1 62,94.5 r90 bottom
Fid6 "JLCPCB Pick & Place Fiducial" "[Fiducial] JLCPCB Pick & Place"#1 -2,94.5 r90 bottom
Fid7 "JLCPCB Pick & Place Fiducial" "[Fiducial] JLCPCB Pick & Place"#1 62,4.5 r90 bottom
Fid8 "JLCPCB Pick & Place Fiducial" "[Fiducial] JLCPCB Pick & Place"#1 -2,4.5 r90 bottom
H1 "[Header] Shrouded 2x5 SMD" "[Header] Shrouded 2x5 SMD" 29,92 r270 top
H2 "[Header] Shrouded 2x5 SMD" "[Header] Shrouded 2x5 SMD" 37,92 r270 top
H3 "[Header] Shrouded 2x5 SMD" "[Header] Shrouded 2x5 SMD" 45,92 r270 top
H4 "1x3 Male" "[Header] Shrouded 1x3 Male" 12.5,93.25 r90 top
H5 "1x3 Male" "[Header] Shrouded 1x3 Male" 18.25,93.25 r270 top
H6 "[Header] Shrouded 1x6 Male" "[Header] Shrouded 1x6 Male" 55.5,82 r270 top
H7 "1x3 Male" "[Header] Shrouded 1x3 Male" 36,80.75 r0 top
H8 "1x3 Male" "[Header] Shrouded 1x3 Male" 47,80.75 r0 top
H9 "1x3 Male" "[Header] Shrouded 1x3 Male" 36,64 r270 top
H10 "1x2 Male" "[Header] Shrouded 1x2 Male" 36,52.5 r270 top
J1 "[Jump] SMD Jumper" "[Jumper] Solderable Jumper" 24,27 r90 top
J2 "[Jump] SMD Jumper" "[Jumper] Solderable Jumper" 57,60.5 r0 bottom
J3 "[Jump] SMD Jumper" "[Jumper] Solderable Jumper" 56.97,57.75 r0 bottom
J4 "[Jump] SMD Jumper" "[Jumper] Solderable Jumper" 57,52.75 r0 bottom
J5 "[Jump] SMD Jumper" "[Jumper] Solderable Jumper" 57,50 r0 bottom
L1 "SMD Inductor" "[Inductor] SMD 0603" 22.175,81.675 r270 top
L2 "SMD Inductor" "[Inductor] SMD 0603" 25,62.5 r90 top
L3 "SMD Inductor" "[Inductor] SMD 0603" 22,61 r90 top
L4 "SMD Inductor" "[Inductor] SMD 0603" 23.5,61 r270 top
L5 "SMD Inductor" "[Inductor] SMD 0603" 11.5,59.5 r270 top
L6 "SMD Inductor" "[Inductor] SMD 0603" 20.6,80.95 r270 bottom
L7 "SMD Inductor" "[Inductor] SMD 0603" 14,46.5 r0 bottom
L8 "742792040" "[Ferrite] SMD Bead 0805 (2)" 2,35 r270 bottom
L9 "SMD Inductor" "[Inductor] SMD 0805" 27.75,25.25 r90 bottom
Mount1 "M3 Mount Hole" "[Mount] M3 Mount Hole"#1 37.592,49.022 r0 top
Mount2 "M3 Mount Hole" "[Mount] M3 Mount Hole"#2 94.5,94.5 r90 top
Mount3 "M3 Mount Hole" "[Mount] M3 Mount Hole"#3 46.228,25.908 r90 top
Mount4 "M3 Mount Hole" "[Mount] M3 Mount Hole"#4 46.475,53.106 r90 top
O1 "[XOSC] SMD 12MHz" "[XOSC] SMD 12MHz" 46,51 r180 bottom
Q1 "PMV48XP" "[FET] P-Channel Mosfet" 8.763,13.97 r270 bottom
R1 "[Res] SMD Resistor" "[Res] SMD 0603" 26.35,74.95 r90 top
R2 "[Res] SMD Resistor" "[Res] SMD 0603" 14.1,73.2 r0 top
R3 "[Res] SMD Resistor" "[Res] SMD 0603" 14.1,71.7 r0 top
R4 "[Res] SMD Resistor" "[Res] SMD 0603" 16,64 r270 top
R5 "[Res] SMD Resistor" "[Res] SMD 0603" 17.5,64 r270 top
R6 "[Res] SMD Resistor" "[Res] SMD 0603" 29,64 r0 top
R7 "[Res] SMD Resistor" "[Res] SMD 0603" 28.5,55 r90 top
R8 "[Res] SMD Resistor" "[Res] SMD 0603" 14,44.5 r0 top
R9 "[Res] SMD Resistor" "[Res] SMD 0603" 33,44.5 r0 top
R10 "[Res] SMD Resistor" "[Res] SMD 0603" 14,43 r0 top
R11 "[Res] SMD Resistor" "[Res] SMD 0603" 2,37 r270 top
R12 "[Res] SMD Resistor" "[Res] SMD 0603" 12,37 r270 top
R13 "[Res] SMD Resistor" "[Res] SMD 0603" 23.5,33.5 r270 top
R14 "[Res] SMD Resistor" "[Res] SMD 0603" 25,33.5 r270 top
R15 "[Res] SMD Resistor" "[Res] SMD 0603" 49.75,35.6 r180 top
R16 "[Res] SMD Resistor" "[Res] SMD 0603" 49.75,34.4 r180 top
R17 "[Res] SMD Resistor" "[Res] SMD 0603" 49.5,24.6 r180 top
R18 "[Res] SMD Resistor" "[Res] SMD 0603" 49.5,23.4 r180 top
R19 "[Res] SMD Resistor" "[Res] SMD 0603" 49.75,13.6 r180 top
R20 "[Res] SMD Resistor" "[Res] SMD 0603" 49.75,12.4 r180 top
R21 "[Res] SMD Resistor" "[Res] SMD 0603" 37,8.175 r90 top
R22 "[Res] SMD Resistor" "[Res] SMD 0603" 38.5,8.175 r90 top
R23 "[Res] SMD Resistor" "[Res] SMD 0603" 13.75,77 r0 bottom
R24 "[Res] SMD Resistor" "[Res] SMD 0603" 10.25,75.5 r270 bottom
R25 "[Res] SMD Resistor" "[Res] SMD 0603" 27,75.95 r180 bottom
R26 "[Res] SMD Resistor" "[Res] SMD 0603" 46,74 r270 bottom
R27 "[Res] SMD Resistor" "[Res] SMD 0603" 44,74 r270 bottom
R28 "[Res] SMD Resistor" "[Res] SMD 0603" 42,74 r270 bottom
R29 "[Res] SMD Resistor" "[Res] SMD 0603" 40,74 r270 bottom
R30 "[Res] SMD Resistor" "[Res] SMD 0603" 38,74 r270 bottom
R31 "[Res] SMD Resistor" "[Res] SMD 0603" 36,74 r270 bottom
R32 "[Res] SMD Resistor" "[Res] SMD 0603" 34,74 r270 bottom
R33 "[Res] SMD Resistor" "[Res] SMD 0603" 3,70.75 r180 bottom
R34 "[Res] SMD Resistor" "[Res] SMD 0603" 24.5,52 r90 bottom
R35 "[Res] SMD Resistor" "[Res] SMD 0603" 23,52 r90 bottom
R36 "[Res] SMD Resistor" "[Res] SMD 0603" 14,49.5 r180 bottom
R37 "[Res] SMD Resistor" "[Res] SMD 0603" 36,47.5 r180 bottom
R38 "[Res] SMD Resistor" "[Res] SMD 0603" 1.5,47.5 r0 bottom
R39 "[Res] SMD Resistor" "[Res] SMD 0603" 36,46 r180 bottom
R40 "[Res] SMD Resistor" "[Res] SMD 0603" 52,45.5 r0 bottom
R41 "[Res] SMD Resistor" "[Res] SMD 0603" 1.5,43.5 r180 bottom
R42 "[Res] SMD Resistor" "[Res] SMD 0603" 51.5,38.25 r90 bottom
R43 "[Res] SMD Resistor" "[Res] SMD 0603" 51.5,31.75 r90 bottom
R44 "[Res] SMD Resistor" "[Res] SMD 0603" 51.5,27.25 r270 bottom
R45 "[Res] SMD Resistor" "[Res] SMD 0603" 51.5,20.75 r270 bottom
R46 "[Res] SMD Resistor" "[Res] SMD 0603" 7,18 r270 bottom
R47 "[Res] SMD Resistor" "[Res] SMD 0603" 5.5,18 r90 bottom
R48 "[Res] SMD Resistor" "[Res] SMD 0603" 51.5,16.25 r90 bottom
R49 "[Res] SMD Resistor" "[Res] SMD 0603" 29.25,16.25 r90 bottom
R50 "[Res] SMD Resistor" "[Res] SMD 0603" 51.5,9.75 r90 bottom
R51 "[Res] SMD Resistor" "[Res] SMD 0603" 40.75,9 r90 bottom
R52 "[Res] SMD Resistor" "[Res] SMD 0603" 34.75,8 r0 bottom
R53 "[Res] SMD Resistor" "[Res] SMD 0603" 44.25,3.25 r90 bottom
Radio1 "RFDX900" "[Device] RFDX900 Radio SMD Mount" 47,56 r270 top
S1 "[Switch] Pushbutton SMD" "[Switch] Pushbutton SMD 2" 5.5,36 r270 top
S2 "[Switch] Pushbutton SMD" "[Switch] Pushbutton SMD 2" 8.5,36 r90 top
S3 "SPDT" "[Switch] SPDT" 26.5,3 r180 top
TP1 "Probe Pad" "[Probe] Touch Pad" 27,51 r0 top
TP2 "Probe Pad" "[Probe] Touch Pad" 27.5,27 r0 top
TP3 "Probe Pad" "[Probe] Touch Pad" 31,27 r0 top
TP4 "Probe Pad" "[Probe] Touch Pad" 17,14 r0 top
TP5 "Probe Pad" "[Probe] Touch Pad" 20.5,14 r0 top
TP6 "Probe Pad" "[Probe] Touch Pad" 24,14 r0 top
TP7 "Probe Pad" "[Probe] Touch Pad" 27.5,14 r0 top
TP8 "Probe Pad" "[Probe] Touch Pad" 31,14 r0 top
TP9 "Probe Pad" "[Probe] Touch Pad" 43.75,8.25 r90 top
TP10 "Probe Pad" "[Probe] Touch Pad" 47.25,8.25 r0 top
TP11 "Probe Pad" "[Probe] Touch Pad" 50.75,8.25 r90 top
U1 "ESP32-S2FN4R2" "[MCU] ESP32-S2" 20,74 r270 top
U2 "NRF24L01P" "[IC] NRF Transceiver" 29.295,59.818 r180 top
U3 "RFX2401C" "[IC] RF Front-End" 16,60 r180 top
U4 "RP2350B" "[MCU] RP2350B" 23,42 r90 top
U5 "[IC] USB Hub Power Distribution" "[IC] USB Hub Power Distribution" 38.75,29.75 r0 top
U6 "W25Q128JVS" "[Mem] 16Mb Flash Memory" 18,30 r90 top
U7 "TUSB2046" "[IC] USB Hub 4port (2)" 38.75,16.5 r90 top
U8 "[IC] Level Shifter (2)" "[IC] Level Shifter (2)" 46.75,68 r0 bottom
U9 "W25Q128JVS" "[Mem] 16Mb Flash Memory" 20,66.75 r0 bottom
U10 "USB-UART Bridge" "[IC] USB-UART Bridge" 44.5,43 r180 bottom
U11 "3.3V 3A" "[Reg] 3V3 Regulator (4)" 21.5,14.5 r90 bottom
U12 "Comparator" "[IC] Dual Op-Ap" 5,12.5 r90 bottom
X1 "USB-C" "[Port] USB-C" 4.5,72 r270 top
X2 "USB-C" "[Port] USB-C" 4.5,45.5 r270 top
X3 "USB-C" "[Port] USB-C" 55.25,35 r90 top
X4 "USB-C" "[Port] USB-C" 55.25,24 r270 top
X5 "USB-C" "[Port] USB-C" 55.25,13 r90 top
X6 "2pin Screw Terminal" "[Screw Terminal] 2pin 5mm" 13.25,4.5 r0 top
X7 "USB-C" "[Port] USB-C" 38,3.5 r0 top
Y1 "40MHz Crystal" "[XTAL] SMD 40MHz" 28.35,74.95 r270 top
Y2 "16 MHz" "[XTAL] SMD 16MHz (2)" 29,66 r0 top
Y3 "12MHz" "[XTAL] SMD 12MHz" 33.75,42 r0 top
Y4 "[XTAL] SMD 6MHz" "[XTAL] SMD 6MHz" 31,9.25 r90 bottom

## Footprints (in the part's own frame and the unit in brackets; to place one, negate y for a bottom-side part, rotate by r counter-clockwise, add the part's x,y. Pads: shape width x height; smd on the part's side, far side on the other; paste and mask are expansions set on the pad)
"[Cap] SMD 0603" [mm]
  rect 0.65x0.7 smd: 1(-0.675,0) 2(0.675,0)
  silkscreen extent 0,-0.4 0,0.4, body extent -0.8,-0.45 0.8,0.45, height 0.8
"[Cap] SMD Polarized, 5mm" [mm]
  rect 2.8x1.6 smd: 1(-2.15,0) 2(2.15,0)
  silkscreen extent -2.65,-2.65 2.65,2.65, body extent -3,-2.65 3,2.65, height 5.8
"[Cap] SMD Polarized, 8mm" [mm]
  rect 4x2 smd: 1(-3.55,0) 2(3.55,0)
  silkscreen extent -4.15,-4.15 4.15,4.15, body extent -4.85,-4.15 4.85,4.15, height 10.2
"[Device] RFDX900 Radio SMD Mount" [mm]
  rect 1.27x1.78 smd paste+0 mask+0.102: 1(-8.89,4.825) 2(-8.89,-4.825) 3(-6.35,4.825) 4(-6.35,-4.825) 5(-3.81,4.825) 6(-3.81,-4.825) 7(-1.27,4.825) 8(-1.27,-4.825) 9(1.27,4.825) 10(1.27,-4.825) 11(3.81,4.825) 12(3.81,-4.825) 13(6.35,4.825) 14(6.35,-4.825) 15(8.89,4.825) 16(8.89,-4.825)
  round 5 hole 3.2: X(-12.5,8.395) X(0,45.795) X(12.5,8.395)
  silkscreen extent -15,-4.2 15,6.9, body extent -15,-5.45 15,100.2, height 12.75
"[Diode] SMD DO-214AB" [mm]
  rect 2.2x3.1 smd: 1(3.5,0) 2(-3.5,0)
  silkscreen extent -3.97,-2.95 3.97,2.95, body extent -3.97,-2.95 3.97,2.95, height 2.5
"[Ferrite] SMD Bead 0805 (2)" [mm] "742792040"
  rect 0.6x1.25 smd: 1(-0.9,0) 2(0.9,0)
  silkscreen extent 0,-0.53 0,0.53, body extent -1,-0.6 1,0.6, height 1.1
"[FET] P-Channel Mosfet" [mm] "PMV48XP"
  rect 0.9x0.8 smd: 1(-1,0.95) 2(-1,-0.95) 3(1,0)
  silkscreen extent -2.1,-1.45 0.65,1.45, body extent -1.15,-1.45 1.15,1.45, height 1.1
"[Fiducial] JLCPCB Pick & Place"#1 [mm]
  round 1 smd paste-2539.97 mask+1: ""(0,0)
"[Fiducial] JLCPCB Pick & Place"#2 [mm]
  round 1 smd paste-2539.97 mask+1: ""(1,0)
"[Fiducial] JLCPCB Pick & Place"#3 [mm]
  round 1 smd paste-2539.97 mask+1: ""(2,0.25)
"[Fuse] Blade Right-Angle" [mm]
  round 2 hole 1.25: 1(-3.75,5.1) 2(3.75,5.1)
  round 3 hole 2: 1(-3.75,-5.1) 2(3.75,-5.1)
  silkscreen extent -8.88,-5.02 9.15,5.45, body extent -9.16,-5.27 8.87,5.2, height 6.04
"[Header] Shrouded 1x2 Male" [mm]
  round 1.725 hole 1.15: 1(-1.27,0) 2(1.27,0)
  silkscreen extent -3.81,-2.54 3.81,2.54, body extent -3.68,-2.54 3.68,4.06, height 11.71
"[Header] Shrouded 1x3 Male" [mm] "070543-0037 / Mates with 005057-9403"
  round 1.725 hole 1.15: 1(-2.54,0) 2(0,0) 3(2.54,0)
  silkscreen extent -5.08,-2.54 5.09,4.06, body extent -5.08,-2.54 5.08,4.06, height 11.67
"[Header] Shrouded 1x6 Male" [mm]
  round 2 hole 1.1: 1(-6.35,0) 2(-3.81,0) 3(-1.27,0) 4(1.27,0) 5(3.81,0) 6(6.35,0)
  silkscreen extent -8.9,-2.54 8.9,2.54, body extent -8.89,-2.54 8.89,4.06, height 11.49
"[Header] Shrouded 2x5 SMD" [mm]
  rect 1x2.75 smd: 1(-4,-2.125) 2(-4,2.125) 3(-2,-2.125) 4(-2,2.125) 5(0,-2.125) 6(0,2.125) 7(2,-2.125) 8(2,2.125) 9(4,-2.125) 10(4,2.125)
  round 1.6 hole 1 unplated: X(-3,0)
  round 1.5 hole 1 unplated: X(3,0)
  silkscreen extent -6.32,-3.5 6.32,3.15, body extent -6.32,-3.12 6.32,3.18, height 7.6
"[IC] Dual Op-Ap" [mm] "LMV358IDGKR"
  rrect25% 1.47x0.4 smd: 1(-2.15,0.975) 2(-2.15,0.325) 3(-2.15,-0.325) 4(-2.15,-0.975) 5(2.15,-0.975) 6(2.15,-0.325) 7(2.15,0.325) 8(2.15,0.975)
  silkscreen extent -3.72,-1.55 1.55,1.56, body extent -2.45,-1.5 2.45,1.5, height 1.1
"[IC] Level Shifter (2)" [mm]
  rect 1.475x0.45 smd: 1(-2.938,2.925) 2(-2.938,2.275) 3(-2.938,1.625) 4(-2.938,0.975) 5(-2.938,0.325) 6(-2.938,-0.325) 7(-2.938,-0.975) 8(-2.938,-1.625) 9(-2.938,-2.275) 10(-2.938,-2.925) 11(2.938,-2.925) 12(2.938,-2.275) 13(2.938,-1.625) 14(2.938,-0.975) 15(2.938,-0.325) 16(2.938,0.325) 17(2.938,0.975) 18(2.938,1.625) 19(2.938,2.275) 20(2.938,2.925)
  silkscreen extent -3.67,-3.25 1.85,3.5, body extent -3.2,-3.25 3.2,3.25, height 1.13
"[IC] NRF Transceiver" [mm] "NRF24L01P-R"
  rect 0.85x0.3 smd: 1(-1.95,1) 2(-1.95,0.5) 3(-1.95,0) 4(-1.95,-0.5) 5(-1.95,-1) 11(1.95,-1) 12(1.95,-0.5) 13(1.95,0) 14(1.95,0.5) 15(1.95,1)
  rect 0.3x0.85 smd: 6(-1,-1.95) 7(-0.5,-1.95) 8(0,-1.95) 9(0.5,-1.95) 10(1,-1.95) 16(1,1.95) 17(0.5,1.95) 18(0,1.95) 19(-0.5,1.95) 20(-1,1.95)
  rect 2.7x2.7 smd: 21(0,0)
  silkscreen extent -2.38,2.13 -2.13,2.37, body extent -2.05,-2.05 2.05,2.05, height 0.95
"[IC] RF Front-End" [mm] "RFX2401C"
  rect 0.8x0.3 smd: 1(-1.5,0.75) 2(-1.5,0.25) 3(-1.5,-0.25) 4(-1.5,-0.75) 9(1.5,-0.75) 10(1.5,-0.25) 11(1.5,0.25) 12(1.5,0.75)
  rect 0.3x0.8 smd: 5(-0.75,-1.5) 6(-0.25,-1.5) 7(0.25,-1.5) 8(0.75,-1.5) 13(0.75,1.5) 14(0.25,1.5) 15(-0.25,1.5) 16(-0.75,1.5)
  rect 1.75x1.75 smd: 17(0,0)
  silkscreen extent -1.88,1.63 -1.63,1.87, body extent -1.55,-1.55 1.55,1.55, height 0.6
"[IC] USB Hub 4port (2)" [mm]
  rect 1.475x0.6 smd: 1(-4.238,2.8) 2(-4.238,2) 3(-4.238,1.2) 4(-4.238,0.4) 5(-4.238,-0.4) 6(-4.238,-1.2) 7(-4.238,-2) 8(-4.238,-2.8) 17(4.238,-2.8) 18(4.238,-2) 19(4.238,-1.2) 20(4.238,-0.4) 21(4.238,0.4) 22(4.238,1.2) 23(4.238,2) 24(4.238,2.8)
  rect 0.6x1.475 smd: 9(-2.8,-4.238) 10(-2,-4.238) 11(-1.2,-4.238) 12(-0.4,-4.238) 13(0.4,-4.238) 14(1.2,-4.238) 15(2,-4.238) 16(2.8,-4.238) 25(2.8,4.238) 26(2,4.238) 27(1.2,4.238) 28(0.4,4.238) 29(-0.4,4.238) 30(-1.2,4.238) 31(-2,4.238) 32(-2.8,4.238)
  silkscreen extent -4.77,-3.15 3.15,4.2, body extent -4.5,-4.5 4.5,4.5, height 1.6
"[IC] USB Hub Power Distribution" [mm]
  rrect25% 1.97x0.6 smd: 1(-2.475,4.445) 2(-2.475,3.175) 3(-2.475,1.905) 4(-2.475,0.635) 5(-2.475,-0.635) 6(-2.475,-1.905) 7(-2.475,-3.175) 8(-2.475,-4.445) 9(2.475,-4.445) 10(2.475,-3.175) 11(2.475,-1.905) 12(2.475,-0.635) 13(2.475,0.635) 14(2.475,1.905) 15(2.475,3.175) 16(2.475,4.445)
  silkscreen extent -3.47,-4.95 1,5.08, body extent -3,-4.95 3,4.95, height 1.75
"[IC] USB-UART Bridge" [mm]
  rect 1.85x0.65 smd: 1(-4.675,5.715) 2(-4.675,4.445) 3(-4.675,3.175) 4(-4.675,1.905) 5(-4.675,0.635) 6(-4.675,-0.635) 7(-4.675,-1.905) 8(-4.675,-3.175) 9(-4.675,-4.445) 10(-4.675,-5.715) 11(4.675,-5.715) 12(4.675,-4.445) 13(4.675,-3.175) 14(4.675,-1.905) 15(4.675,-0.635) 16(4.675,0.635) 17(4.675,1.905) 18(4.675,3.175) 19(4.675,4.445) 20(4.675,5.715)
  silkscreen extent -5.6,-6.4 3.4,6.4, body extent -5.15,-6.4 5.15,6.4, height 2.65
"[Inductor] SMD 0603" [mm]
  rect 0.65x0.7 smd: 1(-0.675,0) 2(0.675,0)
  silkscreen extent 0,-0.4 0,0.4, body extent -0.8,-0.4 0.8,0.4, height 0.95
"[Inductor] SMD 0805" [mm]
  rect 0.6x1.25 smd: 1(-0.9,0) 2(0.9,0)
  silkscreen extent 0,-0.53 0,0.53, body extent -1,-0.63 1,0.63, height 1
"[Jumper] Solderable Jumper" [mil]
  round 1 smd: 1(-13.78,0) 2(22.64,-11.81) 2(22.64,11.81)
  Top Layer region: 5.91,-23.62 29.53,0 39.37,0 39.37,-23.62
  Top Layer region: 29.53,0 5.91,23.62 39.37,23.62 39.37,0
  Top Layer region: -38.39,-23.62 -12.8,-23.62 10.83,0 -12.8,23.62 -38.39,23.62
  silkscreen extent -49,-33 49,33
"[LED] SMD 0805" [mm]
  rrect20% 0.6x1.25 smd: 1(-0.9,0) 2(0.9,0)
  silkscreen extent 0.17,0.3 0.37,0.5, body extent -1,-0.65 1,0.65, height 0.8
"[MCU] ESP32-S2" [mm] "ESP32-S2FN4R2"
  rect 0.85x0.2 smd: 1(-3.45,2.6) 2(-3.45,2.2) 3(-3.45,1.8) 4(-3.45,1.4) 5(-3.45,1) 6(-3.45,0.6) 7(-3.45,0.2) 8(-3.45,-0.2) 9(-3.45,-0.6) 10(-3.45,-1) 11(-3.45,-1.4) 12(-3.45,-1.8) 13(-3.45,-2.2) 14(-3.45,-2.6) 29(3.45,-2.6) 30(3.45,-2.2) 31(3.45,-1.8) 32(3.45,-1.4) 33(3.45,-1) 34(3.45,-0.6) 35(3.45,-0.2) 36(3.45,0.2) 37(3.45,0.6) 38(3.45,1) 39(3.45,1.4) 40(3.45,1.8) 41(3.45,2.2) 42(3.45,2.6)
  rect 0.2x0.85 smd: 15(-2.6,-3.45) 16(-2.2,-3.45) 17(-1.8,-3.45) 18(-1.4,-3.45) 19(-1,-3.45) 20(-0.6,-3.45) 21(-0.2,-3.45) 22(0.2,-3.45) 23(0.6,-3.45) 24(1,-3.45) 25(1.4,-3.45) 26(1.8,-3.45) 27(2.2,-3.45) 28(2.6,-3.45) 43(2.6,3.45) 44(2.2,3.45) 45(1.8,3.45) 46(1.4,3.45) 47(1,3.45) 48(0.6,3.45) 49(0.2,3.45) 50(-0.2,3.45) 51(-0.6,3.45) 52(-1,3.45) 53(-1.4,3.45) 54(-1.8,3.45) 55(-2.2,3.45) 56(-2.6,3.45)
  rect 4.05x4.05 smd: 57(0,0)
  silkscreen extent -3.91,3.71 -3.71,3.91, body extent -3.55,-3.55 3.55,3.55, height 0.9
"[MCU] RP2350B" [mm]
  rrect25% 0.78x0.22 smd: 1(-5,3.8) 2(-5,3.4) 3(-5,3) 4(-5,2.6) 5(-5,2.2) 6(-5,1.8) 7(-5,1.4) 8(-5,1) 9(-5,0.6) 10(-5,0.2) 11(-5,-0.2) 12(-5,-0.6) 13(-5,-1) 14(-5,-1.4) 15(-5,-1.8) 16(-5,-2.2) 17(-5,-2.6) 18(-5,-3) 19(-5,-3.4) 20(-5,-3.8) 41(5,-3.8) 42(5,-3.4) 43(5,-3) 44(5,-2.6) 45(5,-2.2) 46(5,-1.8) 47(5,-1.4) 48(5,-1) 49(5,-0.6) 50(5,-0.2) 51(5,0.2) 52(5,0.6) 53(5,1) 54(5,1.4) 55(5,1.8) 56(5,2.2) 57(5,2.6) 58(5,3) 59(5,3.4) 60(5,3.8)
  rrect25% 0.22x0.78 smd: 21(-3.8,-5) 22(-3.4,-5) 23(-3,-5) 24(-2.6,-5) 25(-2.2,-5) 26(-1.8,-5) 27(-1.4,-5) 28(-1,-5) 29(-0.6,-5) 30(-0.2,-5) 31(0.2,-5) 32(0.6,-5) 33(1,-5) 34(1.4,-5) 35(1.8,-5) 36(2.2,-5) 37(2.6,-5) 38(3,-5) 39(3.4,-5) 40(3.8,-5) 61(3.8,5) 62(3.4,5) 63(3,5) 64(2.6,5) 65(2.2,5) 66(1.8,5) 67(1.4,5) 68(1,5) 69(0.6,5) 70(0.2,5) 71(-0.2,5) 72(-0.6,5) 73(-1,5) 74(-1.4,5) 75(-1.8,5) 76(-2.2,5) 77(-2.6,5) 78(-3,5) 79(-3.4,5) 80(-3.8,5)
  rrect25% 3.4x3.4 smd: Pad(0,0)
  silkscreen extent -5.85,-5.25 5.25,5.85, body extent -5.05,-5.05 5.05,5.05, height 0.96
"[Mem] 16Mb Flash Memory" [mm] "W25Q128JVSIQ TR"
  rect 1.6x0.65 smd: 1(-3.55,1.905) 2(-3.55,0.635) 3(-3.55,-0.635) 4(-3.55,-1.905) 5(3.55,-1.905) 6(3.55,-0.635) 7(3.55,0.635) 8(3.55,1.905)
  silkscreen extent -4.35,-2.61 2.4,2.62, body extent -3.9,-2.61 3.9,2.62, height 1.95
"[Mount] M3 Mount Hole"#1 [mm] "Place at least 4.5mm from board edge. Plated."
  round 6 hole 3.5: 1(-33.092,45.478)
"[Mount] M3 Mount Hole"#2 [mm] "Place at least 4.5mm from board edge. Plated."
  round 6 hole 3.5: 1(0,39)
"[Mount] M3 Mount Hole"#3 [mm] "Place at least 4.5mm from board edge. Plated."
  round 6 hole 3.5: 1(-21.408,41.728)
"[Mount] M3 Mount Hole"#4 [mm] "Place at least 4.5mm from board edge. Plated."
  round 6 hole 3.5: 1(-48.606,-9.025)
"[Port] USB-C" [mm]
  rect 0.27x0.9 smd: A1(-2.625,3.965) A2(-2.125,3.965) A3(-1.625,3.965) A4(-1.125,3.965) A5(-0.625,3.965) A6(-0.125,3.965) A7(0.375,3.965) A8(0.875,3.965) A9(1.375,3.965) A10(1.875,3.965) A11(2.375,3.965) A12(2.875,3.965)
  rect 0.27x0.8 smd: B1(2.625,2.365) B2(2.125,2.365) B3(1.625,2.365) B4(1.125,2.365) B5(0.625,2.365) B6(0.125,2.365) B7(-0.375,2.365) B8(-0.875,2.365) B9(-1.375,2.365) B10(-1.875,2.365) B11(-2.375,2.365) B12(-2.875,2.365)
  round 2.25 hole 1.5: MH(-4.32,3.265) MH(4.32,3.265)
  round 2.75 hole 1.75: MH(-4.32,-1.785) MH(4.32,-1.785)
  round 1.25 hole 0.75: MH(-3.6,1.265) MH(3.6,1.33)
  silkscreen extent -4.47,-4.09 4.47,4.75, body extent -4.51,-4.16 4.43,4.01, height 2.92
"[Probe] Touch Pad" [mm]
  round 2 smd: 1(0,0)
  silkscreen extent -1.4,-1.4 1.4,1.4
"[PTC] 500mA Trip" [mm] "Part #: MF-MSMF050-2"
  rect 1.5x3.2 smd: 1(-2.1,0) 2(2.1,0)
  silkscreen extent -3.33,-1.6 1.1,1.73, body extent -2.27,-1.62 2.27,1.62, height 1.1
"[Reg] 3V3 Regulator (4)" [mm] "3A"
  rect 2.16x1.02 smd: 1(6.25,-3.4) 2(6.25,-1.7) 3(6.25,0) 4(6.25,1.7) 5(6.25,3.4)
  rect 10.41x10.8 smd: 3(-2.07,0)
  silkscreen extent -7.62,-5.8 6.35,5.8, body extent -7.17,-5.08 7.17,5.08, height 4.72
"[Res] SMD 0603" [mm]
  rect 0.65x0.7 smd: 1(-0.675,0) 2(0.675,0)
  silkscreen extent 0,-0.4 0,0.4, body extent -0.8,-0.45 0.8,0.45, height 0.8
"[Screw Terminal] 2pin 5mm" [mm]
  round 2 hole 1.3: 1(-2.5,0) 2(2.58,0)
  silkscreen extent -5.04,-3.5 5.12,4.5, body extent -5.45,-3.5 5.05,4.1, height 9.99
"[SMA] RP-SMA 90deg Jack" [mm]
  rect 2.1x2.1 hole 1.4: 1(0,0)
  round 2.4 hole 1.6: 2(-2.575,-2.575) 3(2.575,-2.575) 4(2.575,2.575) 5(-2.575,2.575)
  silkscreen extent -3.5,-3.5 3.5,3.5, body extent -3.5,-3.46 3.5,11.64, height 9.85
"[Switch] Pushbutton SMD 2" [mm]
  rect 0.8x1.7 smd: 1(1.7,0) 2(-1.7,0)
  rect 0.8x1.1 smd: GND(0,-1.65)
  silkscreen extent -1.5,-2.25 1.8,1.25, body extent -2.02,-2.09 1.98,1.06, height 1.6
"[Switch] SPDT" [mm]
  round 1.5 hole 0.9: 1(0,0) 3(5.08,0)
  rect 1.5x1.5 hole 0.9: 2(2.54,0)
  silkscreen extent -1.27,-1.27 6.35,1.27, body extent -1.71,-1.85 6.79,1.85, height 7.15
"[XOSC] SMD 12MHz" [mm]
  rect 0.4x1.9 smd: 1(-1.2,0) 2(0,0) 3(1.2,0)
  silkscreen extent -1.8,-0.65 1.6,0.65, body extent -1.6,-0.65 1.6,0.65, height 0.8
"[XTAL] SMD 6MHz" [mm]
  rect 2x1.4 smd: 1(3,1.27) 2(-3,1.27) 3(-3,-1.27) 4(3,-1.27)
  silkscreen extent -3.5,-2.5 4,2.5, body extent -3.5,-2.5 3.5,2.5, height 1.3
"[XTAL] SMD 12MHz" [mm]
  rect 1.3x1.05 smd: 1(-1.15,-0.875) 2(1.15,-0.875) 3(1.15,0.875) 4(-1.15,0.875)
  silkscreen extent -1.2,-1.9 0.2,1.25, body extent -1.6,-1.25 1.6,1.25, height 0.75
"[XTAL] SMD 16MHz (2)" [mm] "ABM11-16.000MHZ-12-N1G-T"
  rect 0.75x0.65 smd: 1(-0.65,-0.5) 2(0.65,-0.5) 3(0.65,0.5) 4(-0.65,0.5)
  silkscreen extent -1.4,-1.1 -1.2,-0.9, body extent -1,-0.8 1,0.8, height 0.69
"[XTAL] SMD 40MHz" [mm]
  rect 0.75x0.65 smd: 1(-0.65,-0.5) 2(0.65,-0.5) 3(0.65,0.5) 4(-0.65,0.5)
  silkscreen extent -1.4,-1.1 -1.2,-0.9, body extent -1,-0.8 1,0.8, height 0.69